# Altium PCB mbed-interface.PcbDoc
Units mm, origin at the board's own origin, x right, y up, seen from the top; angles counter-clockwise.
Board outline 25 x 20 mm, 2 copper layers (Top Layer, Bottom Layer), stack 1.571 mm thick; 33 components, 31 nets, 146 pads, 74 vias.
Unrouted connection lines stored in the file: 51.
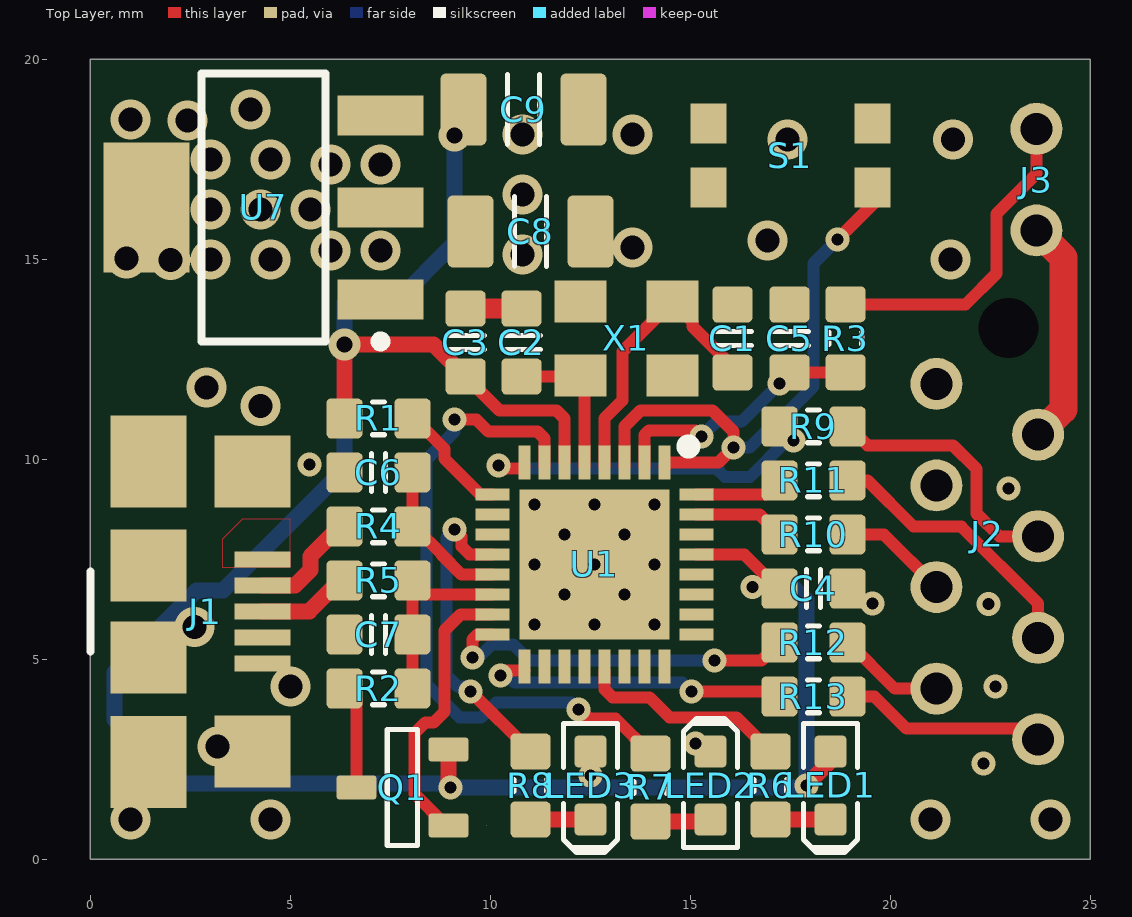
[diagram p0: Top Layer view]
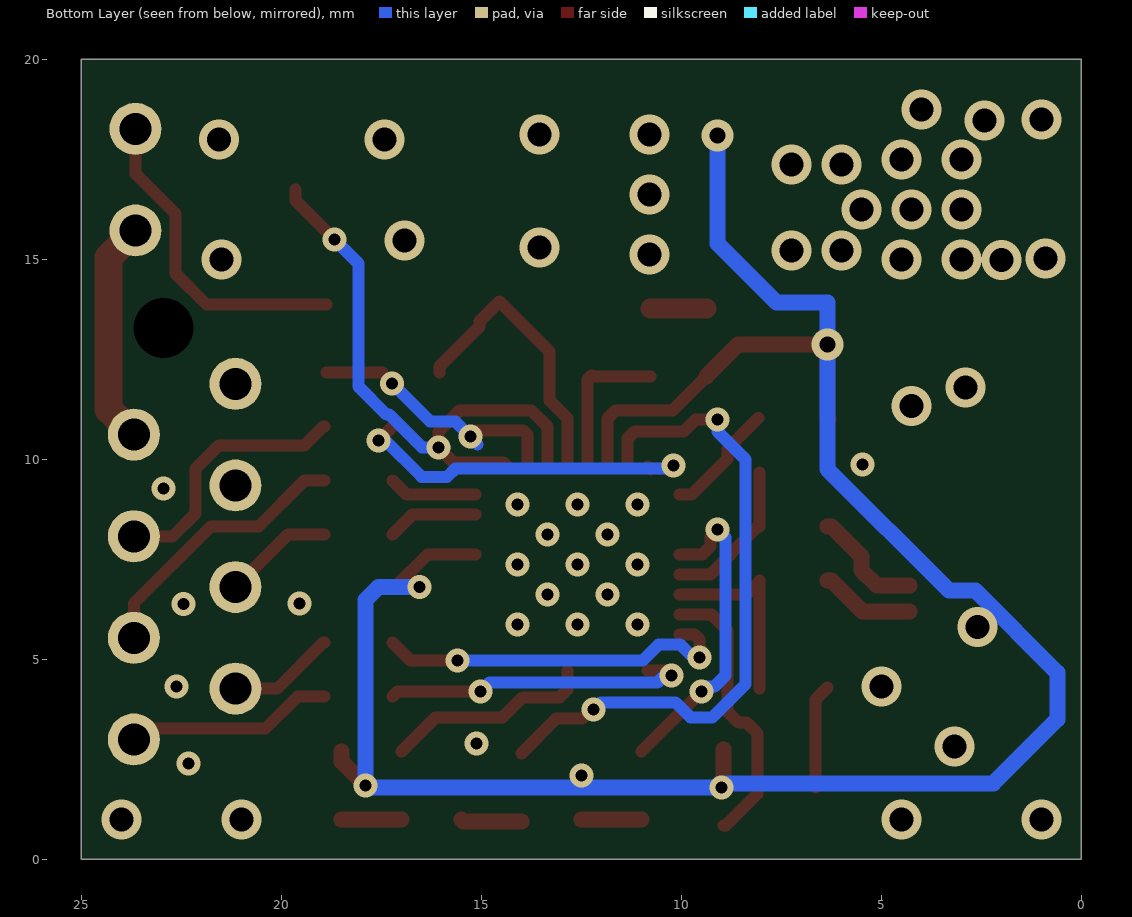
[diagram p1: Bottom Layer view, seen from below]

## Layer stack, top to bottom
Top Solder: solder mask 0.0102, Solder Resist, Dk 3.5
Top Layer: signal copper 0.0356
Dielectric 1: dielectric 1.5, FR-4, Dk 4.8
Bottom Layer: signal copper 0.0356
Bottom Solder: solder mask 0.0102, Solder Resist, Dk 3.5

## Board outline
0,0 25,0 25,20 0,20

## Design rules (kind name [scope] priority, off if disabled: settings)
BoardOutlineClearance [All] p1: gap=0.2 ignorepadtopadclearanceinfootprint=FALSE except(0: Arc-SplitContinuation Track-SplitContinuation SMDPad-SplitContinuation THPad-SplitContinuation Via-SplitContinuation Fill-SplitContinuation Poly-SplitContinuation Region-SplitContinuation Text-SplitContinuation)
Clearance [All] p1: gap=0.2 ignorepadtopadclearanceinfootprint=FALSE except(0: Arc-Hole Track-Hole SMDPad-Hole THPad-Hole Via-Hole Fill-Hole Poly-Hole Region-Hole Text-Hole)
ComponentClearance [All] p1: gap=0.2 collisioncheckmode=3 verticalgap=0.2 showdistances=FALSE
HoleSize [All] p1: absolutevalues=TRUE maxlimit=6 minlimit=0.3 maxpercent=80.000 minpercent=20.000
MinimumSolderMaskSliver [All] p1: minsoldermaskwidth=0.1
PolygonConnect PolygonConnectDIrect [IsVia or InComponent('J1') or InComponent('U7') or InComponent('C8') or InComponent('C9')] p1: connectstyle=Direct reliefconductorwidth=0.3 reliefentries=4 polygonreliefangle="90 Angle" airgapwidth=0.2
PolygonConnect [All] p2: connectstyle=Relief reliefconductorwidth=0.3 reliefentries=4 polygonreliefangle="90 Angle" airgapwidth=0.2
RoomDefinition mbed-interface [InComponentClass('mbed-interface')] p1: confinementstyle=ConfineIn formatcopy=TRUE lockcomponents=FALSE outline -6,0 58,0 58,50 -6,50
RoutingVias [All] p1: holewidth=0.4 width=0.7 viastyle="Through Hole" minholewidth=0.3 minwidth=0.6 maxholewidth=4 maxwidth=5
SilkToSolderMaskClearance [IsPad] p1: minsilkscreentomaskgap=0.2 clearancetoexposedcopper=TRUE
SolderMaskExpansion SolderMaskExpansionVia [IsVia And (Not IsTestpoint)] p1: expansion=-5
SolderMaskExpansion [All] p2: expansion=0.1
Width [All] p1: maxlimit=10 minlimit=0.2 preferedwidth=0.3
26 further rules are at their usual default settings.

## Components (designator, comment, footprint, x,y, rotation, side; value= is the part's Value field where it differs from the comment)
C1 "18p" CAPC1608X90N 16.05,13.025 r90 top value=8p
C2 "18p" CAPC1608X90N 10.775,12.925 r90 top value=8p
C3 "100n" CAPC1608X90N 9.375,12.925 r90 top value=8p
C4 "100n" CAPC1608X90N 18.075,6.775 r0 top value=8p
C5 "100n" CAPC1608X90N 17.475,13.025 r90 top value=8p
C6 "18p" CAPC1608X90N 7.2,9.675 r180 top value=8p
C7 "18p" CAPC1608X90N 7.2,5.625 r180 top value=8p
C8 "10u" CAPC3216X180N 11,15.7 r0 top value=10µ
C9 "10u" CAPC3216X180N 10.825,18.75 r0 top value=10µ
J1 "USB-B-MICRO" USB-B-MICRO-FCI-10104110 4.3,6.2 r270 top
J2 "HEADER-8" MICRO-MATCH-8 21.15,11.89 r90 top
J3 "3.3V_JMP" PIN-HEADER-2 23.65,18.265 r270 top
LED1 "White" LED-0603-WHITE 18.5,1.85 r270 top
LED2 "White" LED-0603-WHITE 15.5,1.85 r90 top
LED3 "White" LED-0603-WHITE 12.5,1.85 r270 top
Q1 "BSS84" SOT23-3 7.8,1.8 r180 top
R1 "10k" RESC1608X55N 7.2,11.025 r180 top value=1K
R2 "1.5k" RESC1608X55N 7.2,4.275 r180 top value=1K
R3 "10k" RESC1608X55N 18.875,13.03 r270 top value=1K
R4 "33R" RESC1608X55N 7.2,8.325 r0 top value=1K
R5 "33R" RESC1608X55N 7.2,6.975 r0 top value=1K
R6 "470R" RESC1608X55N 17,1.85 r270 top value=1K
R7 "470R" RESC1608X55N 14,1.8 r270 top value=1K
R8 "470R" RESC1608X55N 11,1.85 r270 top value=1K
R9 "470R" RESC1608X55N 18.075,10.825 r0 top value=1K
R10 "470R" RESC1608X55N 18.075,8.125 r0 top value=1K
R11 "470R" RESC1608X55N 18.075,9.475 r0 top value=1K
R12 "470R" RESC1608X55N 18.075,5.425 r0 top value=1K
R13 "470R" RESC1608X55N 18.075,4.075 r0 top value=1K
S1 "PUSHBUTTON" KMR421NGLFS 17.5,17.6 r0 top
U1 "LPC11U35FHN33" HVQFN33 14.35,9.925 r270 top
U7 "MCP1825S" SOT230P700X180-4N 4.325,16.3 r180 top
X1 "12MHz" XTAL-3.2x2.5 14.55,13.95 r180 top

## Footprints (in the part's own frame and the unit in brackets; to place one, negate y for a bottom-side part, rotate by r counter-clockwise, add the part's x,y. Pads: shape width x height; smd on the part's side, far side on the other; paste and mask are expansions set on the pad)
CAPC1608X90N [mm] "Chip Capacitor, Body 1.6x0.8mm, EIA 0603, IPC Medium Density"
  round 0.254 on Mech15: 0(0,0)
  rrect25% 0.9x1 smd: 1(-0.85,0) 2(0.85,0)
  Top Layer pour cut-out: -0.6,0.5 -0.4,0.7 0.4,0.7 0.6,0.5 0.6,-0.5 0.4,-0.7 -0.4,-0.7 -0.6,-0.5
  silkscreen extent -0.18,-0.48 0.18,0.48, body extent -0.85,-0.45 0.85,0.45, height 0.89
CAPC3216X180N [mm] "Chip Capacitor, Body 3.2x1.6mm, 1.8mm H, EIA 1206, IPC Medium Density"
  round 0.508 on Mech15: 0(0,0)
  rrect25% 1.15x1.8 smd: 1(-1.5,0) 2(1.5,0)
  silkscreen extent -0.4,-0.88 0.4,0.88, body extent -1.7,-0.9 1.7,0.9, height 1.8
HVQFN33 [mm]
  rect 0.85x0.3 smd: 1(0,0) 2(0,-0.5) 3(0,-1) 4(0,-1.5) 5(0,-2) 6(0,-2.5) 7(0,-3) 8(0,-3.5) 17(5.1,-3.5) 18(5.1,-3) 19(5.1,-2.5) 20(5.1,-2) 21(5.1,-1.5) 22(5.1,-1) 23(5.1,-0.5) 24(5.1,0)
  rect 0.3x0.85 smd: 9(0.8,-4.3) 10(1.3,-4.3) 11(1.8,-4.3) 12(2.3,-4.3) 13(2.8,-4.3) 14(3.3,-4.3) 15(3.8,-4.3) 16(4.3,-4.3) 25(4.3,0.8) 26(3.8,0.8) 27(3.3,0.8) 28(2.8,0.8) 29(2.3,0.8) 30(1.8,0.8) 31(1.3,0.8) 32(0.8,0.8)
  rect 3.75x3.75 smd: 33(2.55,-1.75)
  silkscreen extent -0.5,0.5 -0.3,0.7, body extent 0.05,-4.25 5.05,0.75, height 0.94
KMR421NGLFS [mm]
  rect 0.9x1 smd: 1(-2.05,0.8) 1(2.05,0.8) 2(-2.05,-0.8) 2(2.05,-0.8)
  body extent -2.1,-1.4 2.1,1.4, height 2.5
LED-0603-WHITE [mm]
  round 0.254 on Mech15: 0(0,0)
  rrect25% 0.8x0.8 smd: A(-0.85,0) K(0.85,0)
  Top Layer pour cut-out: -0.5,0.5 0.5,0.5 0.5,-0.5 -0.5,-0.5
  silkscreen extent -1.55,-0.67 1.68,0.67, body extent -0.8,-0.4 0.8,0.4, height 0.75
MICRO-MATCH-8 [mm]
  round 1.3 hole 0.8: 1(0,0) 2(-1.27,-2.54) 3(-2.54,0) 4(-3.81,-2.54) 5(-5.08,0) 6(-6.35,-2.54) 7(-7.62,0) 8(-8.89,-2.54)
  round 0 hole 1.5 unplated: drill(1.4,-1.8)
  body extent -10.49,-3.77 1.6,1.23, height 4
PIN-HEADER-2 [mm]
  round 1.3 hole 0.8: 1(0,0) 2(2.54,0)
RESC1608X55N [mm] "Chip Resistor, Body 1.6x0.8mm, EIA 0603, IPC Medium Density"
  round 0.254 on Mech15: 0(0,0)
  rrect25% 0.9x1 smd: 1(-0.85,0) 2(0.85,0)
  Top Layer pour cut-out: -0.6,0.5 -0.4,0.7 0.4,0.7 0.6,0.5 0.6,-0.5 0.4,-0.7 -0.4,-0.7 -0.6,-0.5
  silkscreen extent -0.15,-0.41 0.15,0.41, body extent -0.87,-0.47 0.88,0.48, height 0.54
SOT23-3 [mm] "SOT23, 3 pin"
  round 0.5 on Mech15: 0(0,0)
  rrect25% 1x0.6 smd: 1(-1.15,0.95) 2(-1.15,-0.95) 3(1.15,0)
  silkscreen extent -0.38,-1.45 0.38,1.45, body extent -1.4,-1.45 1.4,1.45, height 1.29
SOT230P700X180-4N [mm] "SOT223, 4-Leads, Body 6,50x7,00mm (avg), Pitch 2,30mm, IPC Medium Density"
  rect 2.15x1 smd: 1(-2.925,2.3) 2(-2.925,0) 3(-2.925,-2.3)
  rect 2.15x3.25 smd: 4(2.925,0)
  silkscreen extent -3.05,-3.35 1.55,3.47, body extent -1.85,-3.35 1.85,3.35, height 1.8
USB-B-MICRO-FCI-10104110 [mm]
  rect 0.4x1.4 smd: 1(-1.3,0) 2(-0.65,0) 3(0,0) 4(0.65,0) 5(1.3,0)
  rect 2.3x1.9 smd: SH(-3.75,-2.85) SH(3.758,-2.85)
  rect 1.8x1.9 smd: SH(-3.5,-0.25) SH(-1.15,-2.85) SH(1.15,-2.85) SH(3.5,-0.25)
  silkscreen extent -1,-4.3 1,-4.3, body extent -4.04,-5.55 4.04,0.01, height 2.68
XTAL-3.2x2.5 [mm]
  rect 1.3x1.05 smd: 1(0,0) 2(2.3,0) 3(2.3,1.85) 4(0,1.85)
  body extent -0.45,-0.32 2.75,2.18, height 0.8

## Part data
C1 C2 C3 C4 C5 C6 C7: library part CAPC_8p_0603_NP0_50V, "Capacitor SMD Cer 8pF ±0.5pF 50V NP0 0603", Manufacturer 1="Murata Electronics North America", Manufacturer Part Number 1=GRM1885C1H8R0DZ01D, Operating Temperature="-55°C ~ 125°C", Package / Case="0603 (1608 Metric)", Ratings="50V; NP0", Supplier Part Number 1=490-1399-1-ND, Tolerance=±0.5pF, ComponentLink1Description="GRM1885C1H8R0DZ01 datasheet.pdf", ComponentLink1URL=http://search.murata.co.jp/Ceramy/image/img/PDF/ENG/GRM1885C1H8R0DZ01.pdf, SCDType=undef, Size / Dimension="0.063\" L x 0.032\" W (1.60mm x 0.81mm)", Supplier 1=Digi-Key, Thickness (Max)="0.035\" (0.90mm)"
C8 C9: library part CAPC_10u_1206_10V, "Capacitor SMD Cer 10uF 10% 10V X5R 1206", Manufacturer 1=KEMET, Manufacturer Part Number 1=C1206C106K8PACTU, Package / Case="1206 (3216 metric)", Ratings="10V; X5R", Supplier Part Number 1=C1206C106K8PACTU-ND, Tolerance=±10%, Material=ceramic, SCDType=undef, Supplier 1=Digi-Key
J3: library part HEADER-2
LED1 LED2 LED3: library part LED_SMD_White_0603_Bright, "LED 0603 SMD Bright White 8700K", Luminous Flux @ Current - Test=-, Manufacturer 1="Lite-On Inc", Manufacturer 2="Kingbright Corp", Manufacturer Part Number 1=LTW-C193TS5, Manufacturer Part Number 2=APT1608QWF/D, Millicandela Rating=230mcd, Package / Case="0603 (1608 metric)", Ratings="Ultra Bright; 8700K", Supplier Part Number 1=160-1721-1-ND, Voltage - Forward (Vf) @ 10mA=3.0V, Voltage - Forward (Vf) Typ=3.3V, Color=White, ComponentLink1Description=http://media.digikey.com/pdf/Data%20Sheets/Lite-On%20PDFs/LTW-C193TS5.pdf, ComponentLink1URL=http://media.digikey.com/pdf/Data%20Sheets/Lite-On%20PDFs/LTW-C193TS5.pdf, ComponentLink2Description=http://www.kingbrightusa.com/images/catalog/SPEC/APT1608QWF-D.pdf, ComponentLink2URL=http://www.kingbrightusa.com/images/catalog/SPEC/APT1608QWF-D.pdf, Lens Style/Size="Rectangle with Flat Top, 0.8mm x 1.1mm", Lens Type="Clear, Tinted", Material=InGaN, Mounting Type="Surface Mount", SCDType=source, Size / Dimension="1.60mm L x 0.80mm W", Supplier 1=Digi-Key, Supplier 2=Digi-Key, Supplier Part Number 2=APT1608QWF/D-ND, Viewing Angle=120°
Q1: library part MOSFET_BSS84, "MOSFET SMD P-CH 50V 130mA SOT23-3", Current - Continuous Drain (Id) @ 25° C=130mA, Drain to Source Voltage (Vdss)=50V, Input Capacitance (Ciss) @ Vds="73pF @ 25V", Manufacturer 1="Fairchild Semiconductor", Package / Case=SOT23-3, Power - Max=360mW, Ratings="50V; 130mA", Supplier Device Package=SOT-23, Supplier Part Number 1=BSS84CT-ND, ComponentLink1Description=http://www.fairchildsemi.com/ds/BS/BSS84.pdf, ComponentLink1URL=http://www.fairchildsemi.com/ds/BS/BSS84.pdf, FET Feature="Logic Level Gate", FET Type="MOSFET P-Channel, Metal Oxide", Gate Charge (Qg) @ Vgs="1.3nC @ 5V", Manufacturer Part Number 1=BSS84, Material="Metal Oxide", Rds On (Max) @ Id, Vgs="10 Ohm @ 100mA, 5V", SCDType=undef, Supplier 1=Digi-Key, Vgs(th) (Max) @ Id="2V @ 1mA"
R1 R2 R3 R4 R5 R6 R7 R8 R9 R10 R11 R12 R13: library part RES_1K_0603_1%, "Resistor SMD chip 1k Ohm 0.1W 1% 0603", Manufacturer 1=Yageo, Manufacturer Part Number 1=RC0603FR-071KL, Package / Case="0603 (1608 Metric)", Ratings=1/10W, Supplier Part Number 1=311-1.00KHRCT-ND, Tolerance=±1%, SCDType=spec, Supplier 1=Digi-Key
U7: library part MIC5239
X1: library part XTAL-3.2X2.5

## Via types
v1: diameter 0.6, hole 0.3, Top Layer to Bottom Layer, 38 vias
v2: diameter 1, hole 0.6, Top Layer to Bottom Layer, 34 vias
v3: diameter 0.8, hole 0.4, Top Layer to Bottom Layer, 2 vias

## Nets (pads, with @x,y where several pads share a name; then routed paths per layer and width w, separated by ;. In a path a pad name is that pad's centre, name@x,y a point inside that pad or via, vN(x,y) a via of type N, cw(c..) or ccw(c..) an arc to the next point about the centre after c; other vN are vias at no path point)
3.3V: C3.1 C4.1 C9.1 J3.1 LED1.A LED3.A Q1.2 R1.2 R3.1 U1.6 U1.29 U7.3 | length 66.1
  Top Layer w0.3: C3.1 10.225,11.225 11.65,11.225 11.85,11.025 U1.6 ; U1.29 16.346,7.625 C4.1@17.161,6.81 ; R3.1 21.88,13.88 22.65,14.65 22.65,16.139 23.65,17.139 J3.1
  Top Layer w0.4: R1.2@6.325,11.025 6.35,11.05 v3(6.35,12.875) 8.575,12.875 C3.1 ; Q1.2 8.95,1.85 v1(9,1.8) ; v1(16.55,6.81) C4.1@17.161,6.81 ; v1(17.9,1.85) 18.5,2.45 LED1.A
  Bottom Layer w0.4: v3(9.1,18.1) 9.1,15.4 7.63,13.93 6.35,13.93 v3(6.35,12.875) 6.35,9.76 3.315,6.725 2.652,6.725 0.6,4.673 0.6,3.5 2.2,1.9 4.127,1.9 8.9,1.9 v1(9,1.8) 12.5,1.8 ; v1(12.5,2.1) 12.5,1.8 ; v1(16.55,6.81) 17.575,6.81 17.9,6.485 v1(17.9,1.85) 17.85,1.8 12.5,1.8
GND: C1.2 C2.2 C3.2 C4.2 C5.2 C6.2 C7.2 C8.2 C9.2 J1.5 J1.SH J2.1 LED2.K S1.1 U1.33 U7.2 U7.4 | length 1.4
  Top Layer w0.5: C3.2 C2.2
  other v1: 22.325,2.4 15.126,2.9 22.625,4.325 11.1,5.875 12.6,5.875 14.1,5.875 22.45,6.381 19.55,6.403 11.85,6.625 13.35,6.625 11.1,7.375 12.6,7.375 14.1,7.375 11.85,8.125 13.35,8.125 11.1,8.875 12.6,8.875 14.1,8.875 22.95,9.275 5.475,9.875
  other v2: 1,1 4.5,1 21,1 24,1 3.175,2.825 5,4.325 2.6,5.813 4.25,11.334 2,14.99 3,15 4.5,15 21.5,15 0.9,15.029 10.8,15.125 6,15.225 7.25,15.225 13.55,15.3 16.925,15.475 3,16.25 4.25,16.25 5.5,16.25 10.8,16.625 6,17.375 7.25,17.375 3,17.5 4.5,17.5 17.425,18 21.564,18 10.8,18.125 13.55,18.125 2.425,18.475 1,18.5 4,18.75
LED_HID: R8.1 U1.12 | length 8
  Top Layer w0.3: v1(9.1,8.25) 9.275,8.076 9.275,7.83 9.48,7.625 U1.12 ; v1(9.5,4.2) R8.1
  Bottom Layer w0.3: v1(9.1,8.25) 8.9,8.05 8.9,4.6 9.175,4.325 v1@9.55,4.325
LED_MSD: R7.1 U1.7 | length 16.7
  Top Layer w0.3: v1(9.1,11) 9.645,11 9.945,10.7 11.175,10.7 11.35,10.525 U1.7 U1.7@11.35,9.825 ; v1@12.2,3.8 12.472,3.528 13.122,3.528 R7.1
  Bottom Layer w0.3: v1(9.1,11) 9.1,10.7 8.4,10 8.4,4.381 9.231,3.55 9.77,3.55 10.144,3.925 12.025,3.925 v1(12.2,3.75)
LED_UART: R6.1 U1.21 | length 5.3
  Top Layer w0.3: U1.21@12.85,4.725 12.85,4.255 13.055,4.05 13.979,4.05 14.479,3.55 16.15,3.55 R6.1
NetC1_1: C1.1 U1.4 X1.1 | length 7.2
  Top Layer w0.3: U1.4@12.85,9.825 12.85,11.03 13.3,11.48 13.3,12.7 X1.1 15.05,13.45 15.05,13.325 16.05,12.325 C1.1
NetC2_1: C2.1 U1.5 X1.3 | length 3.8
  Top Layer w0.3: C2.1 12.225,12.075 X1.3 12.35,12 U1.5@12.35,9.825
NetJ1_2: J1.2 R4.1 | length 2.9
  Top Layer w0.4: J1.2 5.116,6.85 5.5,7.234 5.5,7.575 6.25,8.325 R4.1
NetJ1_3: J1.3 R5.1 | length 2.4
  Top Layer w0.4: J1.3 5.475,6.2 6.25,6.975 R5.1
NetJ2_4: J2.4 R9.2 | length 6.6
  Top Layer w0.3: R9.2 18.954,10.825 19.429,10.35 21.564,10.35 22.15,9.764 22.15,8.65 22.72,8.08 J2.4
NetJ2_5: J2.5 R10.2 | length 2.8
  Top Layer w0.3: R10.2 19.835,8.125 J2.5
NetJ2_6: J2.6 R11.2 | length 6.9
  Top Layer w0.3: R11.2 19.425,9.475 20.58,8.32 21.773,8.32 23.69,6.403 J2.6
NetJ2_7: J2.7 R12.2 | length 2.7
  Top Layer w0.3: R12.2 18.954,5.425 20.109,4.27 J2.7
NetJ2_8: J2.8 R13.2 | length 5.2
  Top Layer w0.3: R13.2 19.597,4.075 20.402,3.27 23.42,3.27 J2.8
NetLED1_K: LED1.K R6.2 | length 1.5
  Top Layer w0.4: R6.2 LED1.K
NetLED2_A: LED2.A R7.2 | length 1.5
  Top Layer w0.4: R7.2 15.45,0.95 LED2.A
NetLED3_K: LED3.K R8.2 | length 1.5
  Top Layer w0.4: R8.2 LED3.K
NetQ1_3: Q1.3 R2.2 | length 2.6
  Top Layer w0.3: R2.2@6.35,4.3 6.65,4 Q1.3
RESET: C5.1 R3.2 U1.2 | length 6.6
  Top Layer w0.3: U1.2@13.85,9.825 U1.2 13.85,10.616 13.959,10.725 15.126,10.725 v1(15.276,10.575) ; C5.1@17.225,11.9 v1(17.231,11.9) ; C5.1 18.87,12.175 R3.2
  Bottom Layer w0.3: v1@15.098,10.378 v1@15.285,10.565 ; v1(15.276,10.575) 15.651,10.95 16.281,10.95 v1(17.231,11.9) v1@17.275,11.944
RST_BTN: S1.2 U1.1 U1.3 | length 14.8
  Top Layer w0.3: U1.3@13.35,9.825 U1.3 13.35,10.823 13.752,11.225 15.55,11.225 16.075,10.7 v1(16.075,10.3) 15.7,9.925 14.45,9.925 U1.1@14.35,9.825 ; v1(18.675,15.5) 19.65,16.475 S1.2@19.65,16.75
  Bottom Layer w0.3: v1@15.925,10.3 v1(16.075,10.3) 16.481,10.3 17.306,11.125 17.376,11.125 18.075,11.824 18.075,14.9 v1(18.675,15.5)
TGT_3.3V: J2.2 J3.2 | length 5.6
  Top Layer w0.7: J3.2 24.325,15.05 24.325,11.255 J2.2
TGT_NRESET: R9.1 U1.8 | length 9
  Top Layer w0.3: v1@10.2,9.775 10.751,9.775 10.776,9.75 U1.8@10.85,9.825 ; R9.1 v1(17.575,10.475)
  Bottom Layer w0.3: v1@10.2,9.775 15.65,9.775 15.858,9.567 16.494,9.567 17.402,10.475 v1(17.575,10.475)
  other v1: 10.2,9.85
TGT_RX: R11.1 U1.32 | length 2.2
  Top Layer w0.3: U1.32 16.875,9.125 R11.1
TGT_SWCLK: R12.1 U1.16 | length 9.2
  Top Layer w0.3: v1@9.65,5.125 9.55,5.125 9.55,5.5 9.675,5.625 U1.16 ; v1(15.6,4.975) 16.775,4.975 R12.1
  Bottom Layer w0.3: v1@9.55,5.125 9.781,5.125 10.031,5.375 10.569,5.375 10.969,4.975 v1(15.6,4.975)
  other v1: 9.55,5.05
TGT_SWDIO: R13.1 U1.17 | length 7.7
  Top Layer w0.3: v1@10.3,4.725 U1.17@10.85,4.725 ; v1(15.023,4.2) 17.1,4.2 R13.1
  Bottom Layer w0.3: v1@10.3,4.725 10.6,4.425 14.799,4.425 v1(15.023,4.2)
  other v1: 10.25,4.6
TGT_TX: R10.1 U1.31 | length 2.3
  Top Layer w0.3: U1.31 16.725,8.625 R10.1
USB_D+: C7.1 R2.1 R5.2 U1.14 | length 4.8
  Top Layer w0.3: R2.1 C7.1 R5.2@8.05,6.95 ; R5.2 R5.2@8.05,6.95 ; U1.14 8.375,6.625 R5.2@8.05,6.95
USB_D-: C6.1 R4.2 U1.13 | length 3.8
  Top Layer w0.3: R4.2 C6.1 ; R4.2@8.095,8.32 8.775,7.641 8.775,7.623 9.273,7.125 U1.13
USB_SCON: Q1.1 U1.15 | length 7.1
  Top Layer w0.3: Q1.1 8.889,0.85 8.1,1.639 8.1,3.151 8.374,3.425 8.579,3.425 8.85,3.696 8.85,5.725 9.25,6.125 U1.15
USB_VBUS: R1.1 U1.9 | length 2.9
  Top Layer w0.3: R1.1@8.077,11.037 8.85,10.264 8.85,10.02 9.745,9.125 U1.9
VBUS: C8.1 J1.1 U7.1
  other v2: 2.9,11.8
pads on no net: C1.0 C2.0 C3.0 C4.0 C5.0 C6.0 C7.0 C8.0 C9.0 J1.4 J2.3 J2.drill LED1.0 LED2.0 LED3.0 Q1.0 R1.0 R2.0 R3.0 R4.0 R5.0 R6.0 R7.0 R8.0 R9.0 R10.0 R11.0 R12.0 R13.0 U1.10 U1.11 U1.18 U1.19 U1.20 U1.22 U1.23 U1.24 U1.25 U1.26 U1.27 U1.28 U1.30 X1.2 X1.4

## Polygon pours and split planes (outlines as drawn)
GND on Top Layer "Top Layer-No Net 1" (solid, remove dead copper, pour order 6): 29.875,13.15 29.875,33.15 54.875,33.15 54.875,13.15
VBUS on Top Layer "Top Layer-No Net 1" (solid, remove dead copper, pour order 4): 5,7.3 5,8.5 3.8,8.5 3.3,8 3.3,7.3
GND on Bottom Layer "Top Layer-No Net 1" (solid, remove dead copper, pour order 8): 12.1,21.404 37.1,21.404 37.1,41.404 12.1,41.404

## Other copper
Top Layer:
  region net 3.3V: 7.225,18.6
Bottom Layer:
  region: 14.1,10.625

## Silkscreen, mask and mechanical layers (free items; w line width, h text height)
Bottom Solder:
  region: 10.7,9.275 10.7,5.475 14.5,5.475 14.5,9.275
Mechanical 1:
  lines w0.2: 0,0 0,20 25,20 24.92,0 0,0